# EAGLE board extruder-controller (EAGLE 5.06)
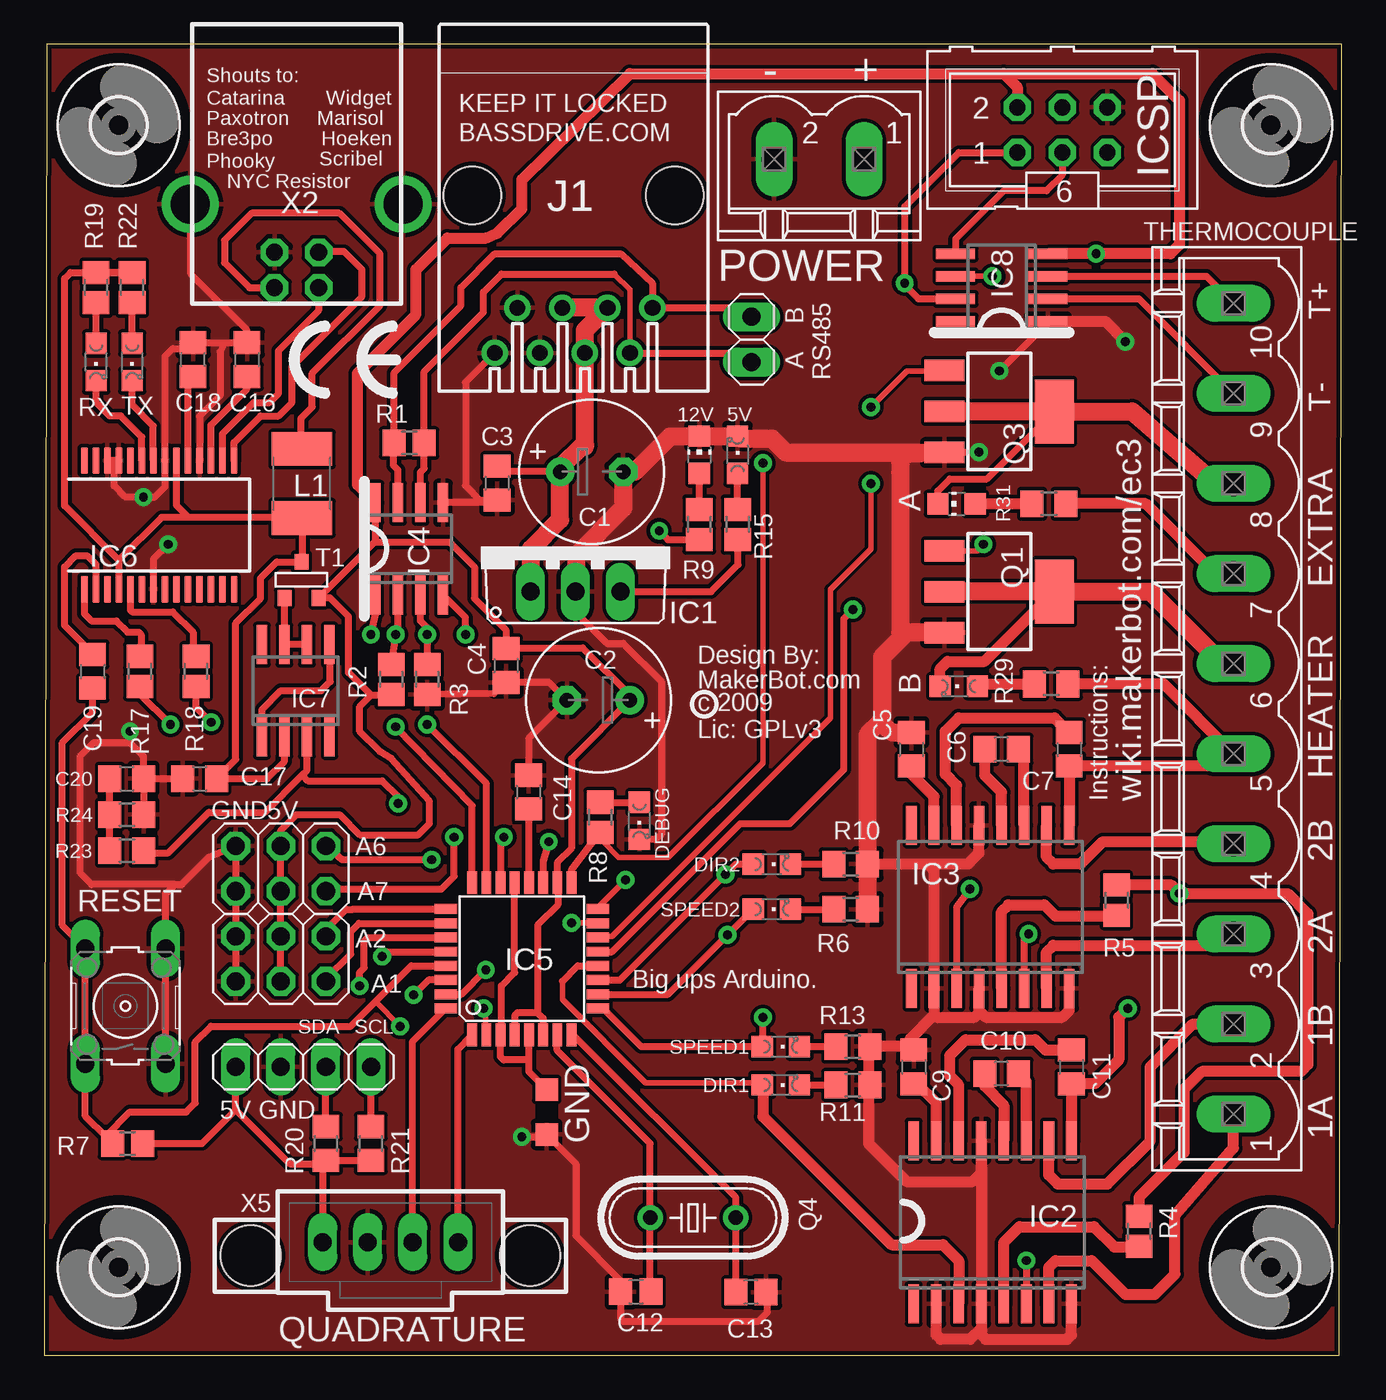
[diagram p0: board, top side]
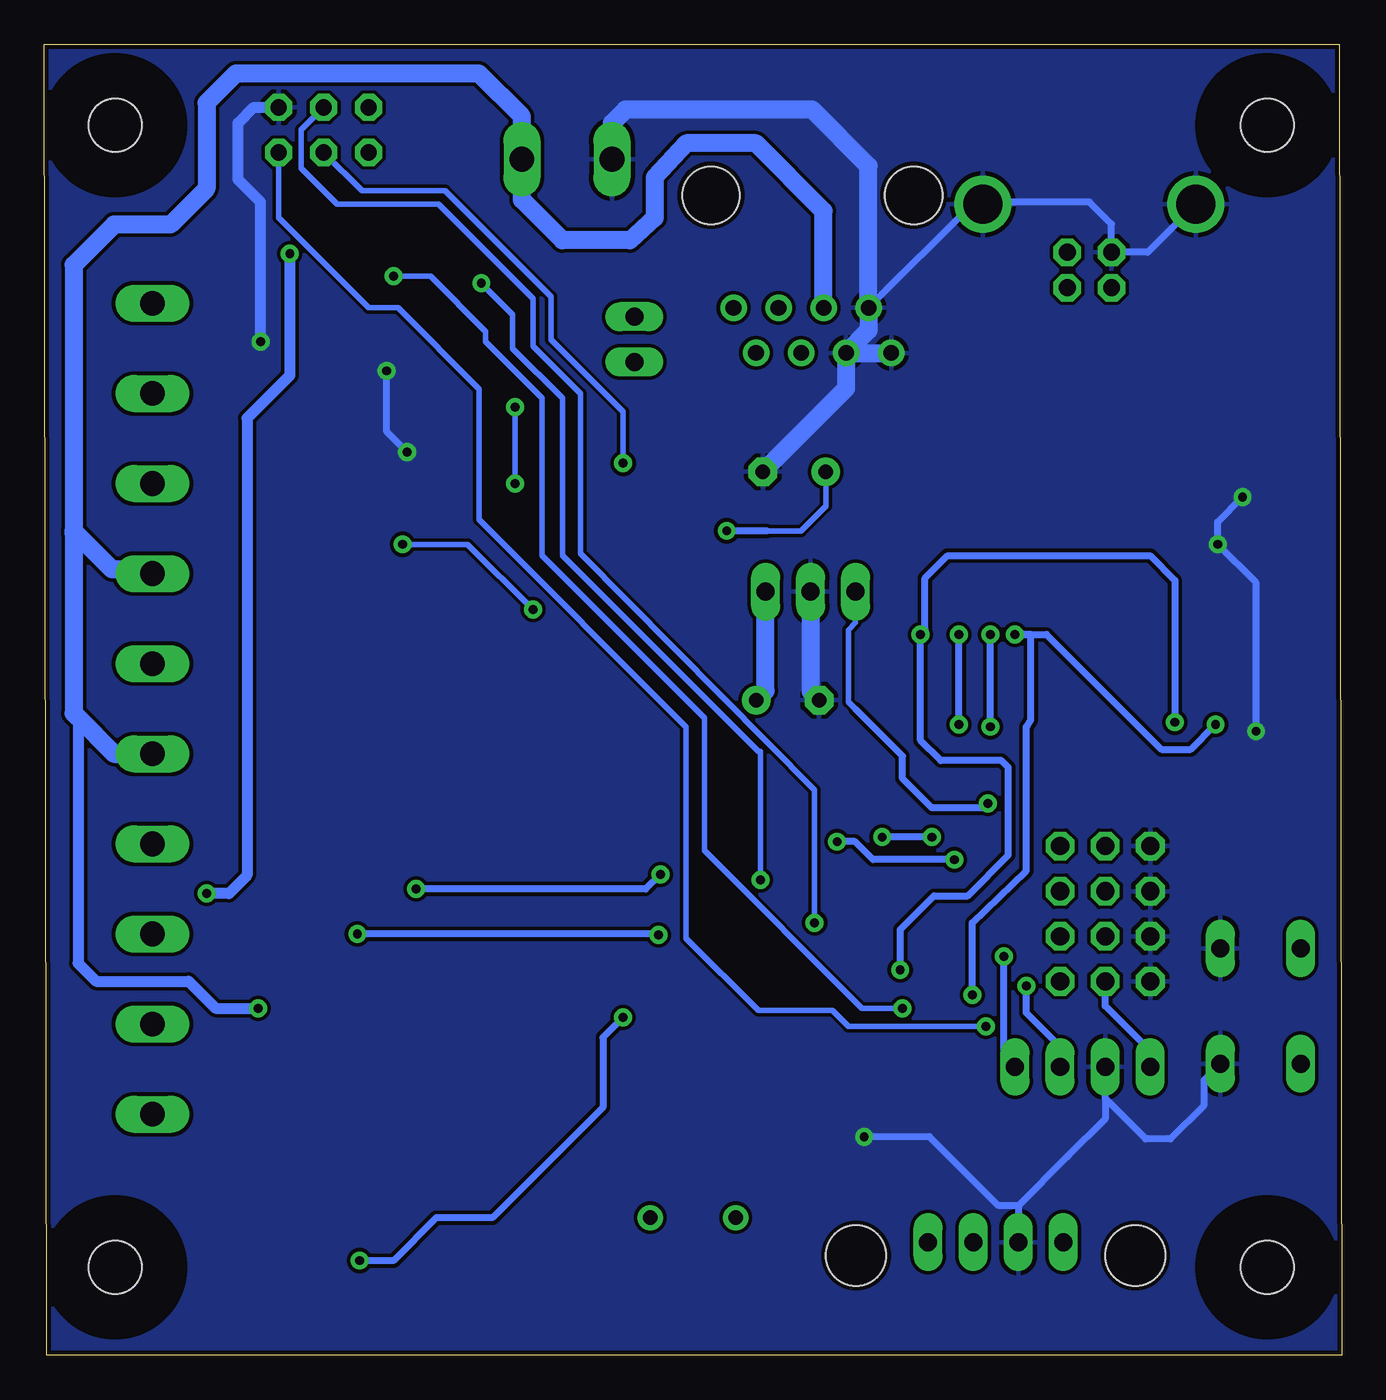
[diagram p1: board, bottom side, seen from below]

Size 73.15 x 73.91 mm. Coordinates in mm from the lower left corner, seen from the top.
Outline: 0,0 73.02,0 73.15,73.91 0.13,73.91 0,0
Copper layers (1*16): Top 0.035mm / dielectric 1.5mm / Bottom 0.035mm
Design rules "SparkFun": minimum track width 8mil, minimum drill 20mil, track to track 8mil, track to pad 8mil, pad to pad 8mil, via to via 8mil, smd to smd 8mil, copper to edge 10mil, drill to drill 8mil, minimum pad ring 12mil, minimum via ring 10mil, stop-mask expansion 4mil, vias tented up to drill 25mil, thermal gap 10mil
Net classes: 0 default: width 0.305 mm; 1 power: width 1.016 mm; 2 motors: width 0.762 mm

## Footprints (pad centres in the part's own frame; a part is rotated, then mirrored left to right if it is on the bottom)
CHIPLED_0805 = smd 1.2 x 1.2: A 0,-1.05; C 0,1.05
CHIP-LED0805 = smd 1.2 x 1.2: A 0,-1.05; C 0,1.05
E3,5-8 = drill 0.813 pad 1.6 round: + -1.778,0 | drill 0.813 pad 1.6 octagon: - 1.778,0
C0805 = smd 1.3 x 1.5: 1 -0.95,0; 2 0.95,0
C0805' = smd 1.3 x 1.5: 1 -0.85,0; 2 0.85,0
TO220V = drill 1.016 long: 1 -2.54,-2.54; 2 0,-2.54; 3 2.54,-2.54
SO16W = smd 0.6 x 2.2: 1 -4.445,-4.6; 2 -3.175,-4.6; 3 -1.905,-4.6; 4 -0.635,-4.6; 5 0.635,-4.6; 6 1.905,-4.6; 7 3.175,-4.6; 8 4.445,-4.6; 9 4.445,4.6; 10 3.175,4.6; 11 1.905,4.6; 12 0.635,4.6; 13 -0.635,4.6; 14 -1.905,4.6; 15 -3.175,4.6; 16 -4.445,4.6
SO08 = smd 0.6 x 2.2: 1 -1.905,-2.6; 2 -0.635,-2.6; 3 0.635,-2.6; 4 1.905,-2.6; 5 1.905,2.6; 6 0.635,2.6; 7 -0.635,2.6; 8 -1.905,2.6
TQFP32-08 = smd 1.27 x 0.559: 1 -4.293,2.8; 2 -4.293,2; 3 -4.293,1.2; 4 -4.293,0.4; 5 -4.293,-0.4; 6 -4.293,-1.2; 7 -4.293,-2; 8 -4.293,-2.8; 17 4.293,-2.8; 18 4.293,-2; 19 4.293,-1.2; 20 4.293,-0.4; 21 4.293,0.4; 22 4.293,1.2; 23 4.293,2; 24 4.293,2.8 | smd 0.559 x 1.27: 9 -2.8,-4.293; 10 -2,-4.293; 11 -1.2,-4.293; 12 -0.4,-4.293; 13 0.4,-4.293; 14 1.2,-4.293; 15 2,-4.293; 16 2.8,-4.293; 25 2.8,4.293; 26 2,4.293; 27 1.2,4.293; 28 0.4,4.293; 29 -0.4,4.293; 30 -1.2,4.293; 31 -2,4.293; 32 -2.8,4.293
SMARTPRJ_SSOP28 = smd 0.381 x 1.499: 1 -4.225,-3.625; 2 -3.575,-3.625; 3 -2.925,-3.625; 4 -2.275,-3.625; 5 -1.625,-3.625; 6 -0.975,-3.625; 7 -0.325,-3.625; 8 0.325,-3.625; 9 0.975,-3.625; 10 1.625,-3.625; 11 2.275,-3.625; 12 2.925,-3.625; 13 3.575,-3.625; 14 4.225,-3.625; 15 4.225,3.625; 16 3.575,3.625; 17 2.925,3.625; 18 2.275,3.625; 19 1.625,3.625; 20 0.975,3.625; 21 0.325,3.625; 22 -0.325,3.625; 23 -0.975,3.625; 24 -1.625,3.625; 25 -2.275,3.625; 26 -2.925,3.625; 27 -3.575,3.625; 28 -4.225,3.625
ML6 = drill 0.914 octagon: 1 -2.54,-1.27; 2 -2.54,1.27; 3 0,-1.27; 4 0,1.27; 5 2.54,-1.27; 6 2.54,1.27
520426-4 = drill 0.889 round: 1 -4.445,6.35; 2 -3.175,8.89; 3 -1.905,6.35; 4 -0.635,8.89; 5 0.635,6.35; 6 1.905,8.89; 7 3.175,6.35; 8 4.445,8.89 | hole 3.251: -5.715,0; 5.715,0
1X02 = drill 1.016 long: 1 -1.27,0; 2 1.27,0
1X04 = drill 1.016 long: 1 -3.81,0; 2 -1.27,0; 3 1.27,0; 4 3.81,0
2X03 = drill 1.016 octagon: 1 -2.54,-1.27; 2 -2.54,1.27; 3 0,-1.27; 4 0,1.27; 5 2.54,-1.27; 6 2.54,1.27
L1812 = smd 1.9 x 3.4: 1 -1.95,0; 2 1.95,0
SOT223 = smd 1.219 x 2.235: 1 -2.311,-3.099; 2 0,-3.099; 3 2.311,-3.099 | smd 3.6 x 2.2: 4 0,3.099
HC49/S = drill 0.813 round: 1 -2.413,0; 2 2.413,0
R0805 = smd 1.3 x 1.5: 1 -0.85,0; 2 0.85,0
R0805' = smd 1.3 x 1.5: 1 -0.95,0; 2 0.95,0
B3F-10XX = drill 1.016 long: 1 -3.251,2.261; 2 3.251,2.261; 3 -3.251,-2.261; 4 3.251,-2.261
SOT-23 = smd 0.787 x 0.889: 1 0.025,-1.016; 2 -0.94,1.016; 3 0.991,1.016
3,0 = hole 3: 0,0
MSTBV2 = drill 1.397 long: 1 -2.54,0; 2 2.54,0
SMARTPRJ_PN61729 = drill 0.95 octagon: 1 1.25,4.71; 2 -1.25,4.71; 3 -1.25,2.71; 4 1.25,2.71 | drill 2.2 round: P$1 -6,0; P$2 6,0
70543-04 = drill 1.016 long: 1 -3.81,0; 2 -1.27,0; 3 1.27,0; 4 3.81,0 | hole 3.404: -7.874,-0.762; 7.874,-0.762
MSTBV10 = drill 1.397 long: 1 -22.86,0; 2 -17.78,0; 3 -12.7,0; 4 -7.62,0; 5 -2.54,0; 6 2.54,0; 7 7.62,0; 8 12.7,0; 9 17.78,0; 10 22.86,0
GND-GNDA = smd 1.27 x 1.27: GND -1.27,0; GNDA 1.27,0

## Placement (x,y rotation side)
5V  [CHIPLED_0805]  39.09,50.77 0 top
12V  [CHIP-LED0805]  36.93,50.77 0 top
A  [CHIP-LED0805]  51.44,48.01 90 top
B  [CHIPLED_0805]  51.56,37.72 90 top
C1  100uF  [E3,5-8]  30.86,49.81 0 top
C2  100uF  [E3,5-8]  31.24,36.93 180 top
C3  100nF  [C0805]  25.53,49.17 270 top
C4  100nF  [C0805]  26.04,38.89 270 top
C5  .22uF  [C0805]  48.9,34.16 270 top
C6  100nF  [C0805]  53.98,34.16 180 top
C7  100nF  [C0805]  57.79,34.16 270 top
C9  .22uF  [C0805]  49.02,16.26 270 top
C10  100nF  [C0805]  53.98,15.88 180 top
C11  100nF  [C0805]  57.91,16.26 270 top
C12  16pf  [C0805']  33.35,3.58 0 top
C13  16pf  [C0805']  39.85,3.56 180 top
C14  100nF  [C0805]  27.3,31.75 270 top
C16  100nF  [C0805]  11.43,56.13 270 top
C17  100nF  [C0805]  8.76,32.51 0 top
C18  100nF  [C0805]  8.38,56.13 90 top
C19  100nF  [C0805]  2.72,38.56 270 top
C20  100nF  [C0805]  4.65,32.51 0 top
DEBUG  [CHIPLED_0805]  33.55,30.12 180 top
DIR1  [CHIPLED_0805]  41.53,15.24 270 top
DIR2  [CHIPLED_0805]  41.02,27.69 270 top
IC1  7805TV  [TO220V]  29.95,45.59 0 top
IC2  A3949  [SO16W]  53.47,7.49 0 top
IC3  A3949  [SO16W]  53.34,25.27 0 top
IC4  SN75176ASOIC  [SO08]  20.57,45.47 0 top
IC5  ATMEGA168  [TQFP32-08]  26.92,22.35 90 top
IC6  FT232RL  [SMARTPRJ_SSOP28]  6.48,46.81 0 top
IC7  LM358D  [SO08]  14.17,37.47 0 top
IC8  MAX6675  [SO08]  53.98,60.2 90 top
ICSP  [ML6]  57.4,69.09 0 top
J1  [520426-4]  29.84,65.41 180 top
JP1  [1X02]  39.88,57.28 270 top
JP4  [1X04]  14.61,16.26 0 top
JP6  [2X03]  13.34,22.35 0 top
JP7  [2X03]  13.34,27.43 0 top
L1  100mA  [L1812]  14.53,49.15 90 top
Q1  NIF5003  [SOT223]  53.85,43.05 270 top
Q3  NIF5003  [SOT223]  53.85,53.21 270 top
Q4  16MHZ  [HC49/S]  36.58,7.75 180 top
R1  180  [R0805]  20.57,51.44 180 top
R2  4.7k  [R0805]  19.56,38.1 270 top
R3  4.7k  [R0805]  21.59,38.1 270 top
R4  10K  [R0805]  61.72,6.99 270 top
R5  10K  [R0805]  60.45,25.65 270 top
R6  1K  [R0805']  45.47,25.15 0 top
R7  10K  [R0805]  4.7,11.94 0 top
R8  1K  [R0805]  31.34,30.33 270 top
R9  1K  [R0805]  36.93,46.84 270 top
R10  1K  [R0805']  45.47,27.69 180 top
R11  1K  [R0805']  45.59,17.4 0 top
R13  1K  [R0805']  45.59,15.24 180 top
R15  1K  [R0805]  39.09,46.84 270 top
R17  1K  [R0805]  5.38,38.56 90 top
R18  1K  [R0805]  8.56,38.56 90 top
R19  1K  [R0805]  2.92,60.2 270 top
R20  4.7K  [R0805']  15.88,11.94 270 top
R21  4.7K  [R0805']  18.41,11.94 270 top
R22  1K  [R0805]  4.95,60.2 270 top
R23  10K  [R0805']  4.65,28.45 0 top
R24  10K  [R0805']  4.65,30.48 180 top
R29  1K  [R0805']  56.77,37.85 0 top
R31  1K  [R0805']  56.64,48.01 0 top
RESET  [B3F-10XX]  4.57,19.68 90 top
RX  [CHIPLED_0805]  2.92,56.01 180 top
SPEED1  1  [CHIPLED_0805]  41.53,17.4 270 top
SPEED2  1  [CHIPLED_0805]  41.02,25.15 270 top
T1  [SOT-23]  14.53,43.71 180 top
TX  [CHIPLED_0805]  4.95,56.01 180 top
U$1  [3,0]  4.19,4.95 0 top
U$2  [3,0]  4.19,69.35 0 top
U$3  [3,0]  69.16,69.35 0 top
U$4  [3,0]  69.16,4.95 0 top
X1  MSTBV2  [MSTBV2]  43.69,67.44 180 top
X2  [SMARTPRJ_PN61729]  14.22,64.9 180 top
X5  C-GRID-04-70543  [70543-04]  19.51,6.38 0 top
X6  MSTBV10  [MSTBV10]  67.06,36.45 90 top
~NUDEV~1  GND-GNDA  [GND-GNDA]  28.32,13.72 90 top

## Library data of the parts
5V 12V A B DEBUG DIR1 DIR2 RX SPEED1 SPEED2 TX = led
C1-C7 C9-C11 C14 C16-C20 R6 R10 R11 R13 R20 R21 R23 R24 R29 R31 = rcl
C12 C13 L1 R1-R5 R7-R9 R15 R17-R19 R22 = resistor
IC1 IC7 = linear
IC2-IC4 IC6 IC8 X2 X5 = reprap
IC5 = SparkFun
ICSP = con-harting-ml
J1 = con-amp
JP1 JP4 JP6 JP7 = pinhead
Q1 Q3 = transistor-power
Q4 = crystal
RESET = switch-omron
T1 = zetex
U$1-U$4 = holes
X1 X6 = con-phoenix-508
~NUDEV~1 = supply1

## Nets
+12V [power]: C1.+ C3.1 C7.2 C11.2 IC1.1 IC2.9 IC3.9 IC7.3 J1.3 J1.4 J1.5 R9.2 R23.2 R29.2 R31.2 X1.1 X6.5 X6.7
A0: IC4.3 IC5.23 R3.1
A1: IC4.2 IC5.24 R2.1
A2: IC5.25 JP6.6
A3: IC5.26 JP6.5
A6: IC5.19 JP7.6
A7: IC5.22 JP7.5
D2: IC5.32 X5.3
D3: IC5.1 X5.4
D4: IC5.2 IC8.6
D5: IC2.6 IC5.9 SPEED1.A
D6: IC3.6 IC5.10 SPEED2.A
D7: DIR2.A IC3.3 IC5.11
D8: DIR1.A IC2.3 IC5.12
D9: IC5.13 Q1.1
D10: IC5.14 Q3.1
D11: IC5.15 ICSP.4
D12: IC5.16 IC8.7 ICSP.1
D13: IC5.17 IC8.5 ICSP.3 R8.2
GND [power]: 5V.C 12V.C C1.- C2.- C3.2 C4.2 C5.1 C9.1 C12.1 C13.1 C14.1 C16.1 C17.1 C18.2 C20.2 DEBUG.C IC1.2 IC2.2 IC2.4 IC2.8 IC2.13 IC3.2 IC3.4 IC3.8 IC3.13 IC4.5 IC6.7 IC6.18 IC6.21 IC6.25 IC6.26 IC8.1 ICSP.6 J1.6 J1.7 J1.8 JP4.2 JP6.1 JP6.2 JP7.1 JP7.2 Q1.3 Q3.3 R3.2 R6.2 R10.1 R11.2 R13.1 R24.1 RESET.3 RESET.4 X1.2 X2.4 X2.P$1 X2.P$2 X5.2 ~NUDEV~1.GND
GNDA: IC5.3 IC5.5 IC5.21 ~NUDEV~1.GNDA
N$3: C9.2 IC2.15
N$4 [motors]: IC2.7 X6.1
N$5 [motors]: IC2.10 X6.2
N$6: C10.2 IC2.12
N$7: C10.1 IC2.11
N$8: DEBUG.A R8.1
N$9: C11.1 IC2.14
N$10: IC8.2 X6.9
N$11: IC8.3 X6.10
N$12: IC2.5 R4.2
N$15: C5.2 IC3.15
N$16: C6.2 IC3.12
N$17: C6.1 IC3.11
N$18: R11.1 SPEED1.C
N$19: C7.1 IC3.14
N$20: C14.2 IC5.20
N$23: DIR1.C R13.2
N$24: IC3.5 R5.2
N$25: 5V.A R15.1
N$26: 12V.A R9.1
N$27 [motors]: IC3.7 X6.3
N$28 [motors]: IC3.10 X6.4
N$29: IC6.15 X2.3
N$30: IC6.16 X2.2
N$31: C12.2 IC5.7 Q4.2
N$32: C13.2 IC5.8 Q4.1
N$33: R6.1 SPEED2.C
N$34 [power]: B.C Q1.2 Q1.4 X6.6
N$35 [power]: A.C Q3.2 Q3.4 X6.8
N$36: C18.1 IC6.19
N$37: L1.2 X2.1
N$38: C16.2 IC6.17
N$39: R19.2 RX.A
N$40: R22.2 TX.A
N$41: A.A R31.1
N$42: B.A R29.1
N$43: DIR2.C R10.2
N$44: IC6.23 RX.C
N$45: IC6.22 TX.C
N$46: C19.1 IC6.2
N$47: IC6.1 R17.2
N$48: IC6.5 R18.2
N$49: C20.1 R23.1 R24.2
N$50: IC7.1 IC7.5
N$51: IC7.6 IC7.7 T1.3
RESET: C19.2 IC5.29 ICSP.5 R7.1 RESET.1 RESET.2
RS485A: IC4.6 J1.2 JP1.2 R1.1
RS485B: IC4.7 J1.1 JP1.1 R1.2
RX: IC4.1 IC5.30 R17.1
SCL: IC5.28 JP4.4 R21.1
SDA: IC5.27 JP4.3 R20.1
TX: IC4.4 IC5.31 R18.1
USBVCC: C17.2 IC6.4 IC6.20 IC7.2 L1.1 R19.1 R22.1 T1.1
V+: IC7.8
V-: IC7.4
VCC: C2.+ C4.1 IC1.3 IC4.8 IC5.4 IC5.6 IC5.18 IC8.4 ICSP.2 JP4.1 JP6.3 JP6.4 JP7.3 JP7.4 R2.2 R4.1 R5.1 R7.2 R15.2 R20.2 R21.2 T1.2 X5.1

## Tracks (layer width: path | path; a pad name or v marks a point on that pad's centre or on a via)
+12V  (via drill 0.5)
  Top 0.406: IC7.3 14.81,32.97 14.54,32.7 | 14.54,32.7 12.45,30.61 9.27,30.61 6.98,28.32 5.72,28.32 R23.2 | R9.2 35.16,45.99 v34.67,46.48 | v19.94,31.11 19.94,31.5 19.05,32.38 14.86,32.38 14.54,32.7 | C1.+ 25.84,49.81 C3.1
  Top 0.61: IC2.9 C11.2 59.25,15.31 60.58,16.64 60.58,19.05 v61.09,19.56 | IC3.9 C7.2 66.99,33.21 X6.5 63.12,37.85 R29.2 | R31.2 62.1,48.01 66.04,44.07 X6.7
  Top 1.016: J1.5 J1.3 30.48,57.79 J1.4 30.48,51.44 | 30.48,51.44 30.48,51.21 | X6.7 68.33,44.07 | IC1.1 27.43,43.08 27.43,45.47 29.08,47.12 C1.+ 29.08,50.04 30.48,51.44
  Bottom 0.305: IC1.1 27.41,41.3 27.81,40.89 27.81,36.83 27.41,36.42 | 32.41,46.48 30.48,46.48 29.08,47.88 C1.+
  Bottom 0.406: 32.41,46.48 v34.67,46.48 | 27.41,36.42 24.77,33.78 24.77,32.51 23.11,30.86 20.19,30.86 v19.94,31.11
  Bottom 0.61: v61.09,19.56 63.5,19.56 65.02,21.08 70.23,21.08 71.25,22.1 71.25,35.94 71.31,36
  Bottom 1.016: 71.44,46.42 69.34,44.32 67.94,44.32 X6.7 | 71.44,46.42 71.5,46.48 71.5,61.47 69.21,63.75 66.04,63.75 64.01,65.79 64.01,70.61 62.36,72.26 48.64,72.26 46.23,69.85 X1.1 | X6.5 69.21,33.91 71.31,36 71.5,36.2 71.5,46.36 71.44,46.42 | X1.1 46.1,67.44 | J1.3 31.88,59.18 | X1.1 46.23,65.15 43.94,62.87 40.13,62.87 38.73,64.14 38.73,66.42 36.96,68.33 33.02,68.33 29.21,64.52 J1.5
A0  (via drill 0.5)
  Top 0.406: R3.1 v21.59,40.64 21.59,41.02 21.21,41.4 IC4.3 | IC5.23 24.92,32.23 v21.59,35.56
  Bottom 0.406: v21.59,35.56 v21.59,40.64
A1  (via drill 0.5)
  Top 0.406: IC4.2 19.94,41.02 v19.81,40.64 R2.1 | IC5.24 24.12,30.99 v19.81,35.43
  Bottom 0.406: v19.81,35.43 v19.81,40.64
A2
  Top 0.406: IC5.25 17.4,25.15 17.02,25.15 16,24.13 JP6.6
A3
  Top 0.406: IC5.26 17.75,24.35 17.27,23.88 17.27,22.61 15.88,21.21 JP6.5
A6  (via drill 0.5)
  Top 0.406: IC5.19 28.12,27.87 v28.45,28.96 | v21.84,27.94 16.76,27.94 JP7.6
  Bottom 0.406: v28.45,28.96 27.43,28.96 26.42,27.94 v21.84,27.94
A7  (via drill 0.5)
  Top 0.406: IC5.22 25.72,29.03 v25.91,29.21 | v23.11,29.21 23.11,27.01 22.4,26.29 16,26.29 JP7.5
  Bottom 0.406: v23.11,29.21 v25.91,29.21
D2
  Top 0.406: X5.3 20.78,17.7 IC5.32
D3
  Top 0.406: X5.4 23.32,17.25 IC5.1
D4  (via drill 0.51)
  Top 0.305: v24.77,19.56 24.89,19.43 24.89,18.16 IC5.2 | v53.47,60.83 IC8.6
  Bottom 0.305: v24.77,19.56 27.05,19.56 35.94,28.45 35.94,35.94 45.09,45.09 45.09,53.98 48.26,57.15 48.26,57.72 IC8.6 v53.47,60.83
D5  (via drill 0.5)
  Top 0.406: IC5.9 31.5,19.55 33.66,17.4 SPEED1.A 40.51,17.43 v40.51,19.05 | v55.37,5.33 IC2.6
  Bottom 0.406: v55.37,5.33 53.47,5.33 51.05,7.75 47.88,7.75 41.66,13.97 41.66,17.91 v40.51,19.05
D6  (via drill 0.5)
  Top 0.406: IC5.10 35.18,20.35 v38.53,23.7 SPEED2.A | IC3.6 55.25,23.5 v55.5,23.75
  Bottom 0.406: v55.5,23.75 38.57,23.75 v38.53,23.7
D7  (via drill 0.5)
  Top 0.406: IC5.11 32.46,21.15 v38.42,27.11 | v38.42,27.11 38.99,27.69 DIR2.A | IC3.3 51.44,25.27 v52.2,26.29 | v38.42,27.11 38.73,27.43
  Bottom 0.406: v52.2,26.29 39.24,26.29 v38.42,27.11
D8
  Top 0.305: 29.21,21.08 29.21,20.07 33.91,15.37 40.35,15.37 DIR1.A
  Top 0.406: IC5.12 30.08,21.95 29.21,21.08
  Top 0.61: IC2.3 51.56,5.33 50.67,6.22 47.75,6.22 40.51,13.46 40.51,15.21 DIR1.A
D9  (via drill 0.5)
  Top 0.305: 50.72,45.34 52.58,45.34 v52.96,45.72
  Top 0.406: IC5.13 32.02,22.75 39.24,29.97 42.04,29.97 45.09,33.02 45.09,41.53 v45.59,42.04 | 50.72,45.34 Q1.1
  Bottom 0.305: v52.96,45.72 49.28,45.72 v45.59,42.04
D10  (via drill 0.51)
  Top 0.305: IC5.14 31.24,23.62 32,23.62 44.32,35.94 44.32,43.18 46.61,45.47 v46.61,49.15 | Q3.1 50.67,55.5 48.64,55.5 v46.61,53.47
  Bottom 0.305: v46.61,49.15 v46.61,53.47
D11  (via drill 0.51)
  Top 0.305: v29.72,24.38 31.11,24.38 IC5.15
  Bottom 0.305: v29.72,24.38 29.72,31.88 42.93,45.21 42.93,54.23 45.59,56.9 45.59,59.56 50.93,64.9 56.64,64.9 58.67,66.93 58.67,69.09 ICSP.4
D12  (via drill 0.5, 0.51)
  Top 0.305: v32.77,26.8 31.24,25.27 IC5.16
  Top 0.406: IC8.7 49.28,59.56 48.77,60.07 48.51,60.33 v48.51,60.45 48.51,64.77 51.56,67.82 ICSP.1
  Bottom 0.305: v32.77,26.8 32.77,34.04 32.89,34.04 43.94,45.09 43.94,53.98 46.74,56.77 46.74,58.67 v48.51,60.45
D13  (via drill 0.51)
  Top 0.305: v40.51,50.29 40.51,33.4 35.18,28.07 32.39,28.07 31.5,28.96 R8.2
  Top 0.406: IC5.17 29.72,27.35 R8.2 | IC8.5 51.38,62.93 54.1,65.66 56.52,65.66 57.4,66.55 ICSP.3
  Bottom 0.305: v40.51,50.29 40.51,53.21 44.58,57.28 44.58,59.69 50.55,65.66 55.25,65.66 ICSP.3
GND  (via drill 0.5)
  Top 0.406: IC6.26 IC6.25 3.94,50.17 3.94,49.02 4.57,48.39 v5.59,48.39 6.22,48.39 6.8,48.97 IC6.21 6.8,56.33 7.24,56.77 8.32,56.77 C18.2 10.16,57.08 | 10.16,57.08 C16.1 11.43,57.79 8.26,60.96 8.26,64.87 X2.P$2 | IC6.18 8.75,52.95 9.91,54.1 9.91,56.58 10.16,57.08 | IC4.5 25.37,48.07 C3.2 24.55,48.22 23.75,49.02 23.75,54.86 J1.8 | R3.2 25.35,37.3 C4.2 28.46,37.94 C2.- 27.3,34.77 C14.1 | C20.2 C17.1 | C20.2 R24.1 | 7.37,26.54 2.67,26.54 2.03,27.18 2.03,33.78 2.79,34.54 4.83,34.54 | 7.37,26.54 7.75,26.54 9.27,28.07 JP7.2 JP7.1 JP6.2 JP6.1 | 4.83,34.54 5.59,33.78 5.59,32.52 C20.2 | IC6.7 6.15,44.89 v6.98,45.72 | 4.83,34.54 v4.83,35.18 | v26.92,12.32 28.19,12.32 ~NUDEV~1.GND 29.97,10.79 29.97,6.73 32.5,4.2 C12.1 32.5,2.04 32.64,1.91 40.26,1.91 40.77,2.41 40.77,3.49 C13.1 | RESET.3 RESET.4 6.83,26.01 7.37,26.54 | DEBUG.C 34.41,29.07 34.8,29.34 34.8,37.97 32.64,40.13 31.72,40.13 29.95,41.91 IC1.2 | IC8.1 56.58,58.23 v53.85,55.5 | v52.71,50.93 50.77,50.93 Q3.3
  Top 0.61: IC2.8 57.91,1.14 57.66,0.89 53.09,0.89 52.83,1.14 IC2.4 | IC2.4 52.83,1.52 52.2,0.89 50.55,0.89 50.29,1.14 IC2.2 | IC2.4 IC2.13 52.83,10.29 52.32,9.78 48.64,9.78 46.48,11.94 46.48,15.18 R13.1 46.48,15.05 46.48,17.34 R11.2 48.83,17.4 48.83,17.84 50.16,19.18 | 50.16,19.18 IC3.2 50.16,27.3 49.78,27.69 | 50.16,19.18 50.29,19.05 52.45,19.05 52.71,19.3 IC3.4 52.71,19.43 53.09,19.05 57.4,19.05 57.79,19.43 IC3.8 | IC3.13 52.71,28.32 52.07,27.69 49.78,27.69 | R10.1 49.78,27.69 | IC8.1 59.82,58.29 v60.96,57.15
  Top 1.016: IC1.2 29.97,43.08 29.97,45.09 32.64,47.75 C1.- 33.3,49.81 35.31,51.82 36.92,51.82 12V.C 5V.C 39.23,51.69 41.02,51.69 41.81,50.9 Q3.3 48.23,50.78 48.26,49.78 48.26,40.77 50.72,40.77 Q1.3 48.62,40.74 47.24,39.37 47.24,35.81 47.12,35.69 | R6.2 R10.1 46.42,34.99 47.12,35.69 | 48.83,17.4 C9.1 | C5.1 47.82,35.11 47.12,35.69
  Bottom 0.406: X2.P$2 10.93,62.19 X2.4 12.97,63.77 14.22,65.02 20.1,65.02 X2.P$1 20.83,64.9 J1.7 | v5.59,48.39 6.98,46.99 v6.98,45.72 4.83,43.56 v4.83,35.18 | 18.24,8.43 X5.2 | 15.49,11.18 18.24,8.43 | 15.49,11.18 15.37,11.3 | 18.24,8.43 19.36,8.43 23.24,12.32 v26.92,12.32 | 13.34,14.48 JP4.2 | 13.34,14.48 11.05,12.19 9.65,12.19 7.75,14.1 7.75,15.52 RESET.3 | 13.34,14.48 13.34,13.33 15.49,11.18 | v53.85,55.5 53.85,52.07 v52.71,50.93
  Bottom 0.61: v60.96,57.15 60.96,65.02 62.23,66.29 62.23,69.47 61.34,70.36 ICSP.6
  Bottom 1.016: IC1.2 29.95,37.41 C2.- | J1.6 26.67,57.79 J1.7 26.67,67.06 29.84,70.23 40.39,70.23 41.15,69.47 X1.2 | J1.6 J1.8 | J1.6 27.94,54.51 C1.-
  pour Bottom: -1.14,74.55 73.79,74.55 73.79,-0.38 -1.14,-0.38
  pour Top: -1.14,74.55 73.79,74.55 73.79,0.89 73.79,-0.38 -1.14,-0.38
GNDA
  Top 0.406: 27.32,16.64 27.32,15.98 ~NUDEV~1.GNDA | 27.32,16.64 IC5.5 | 27.32,16.64 25.91,16.64 25.72,16.82 IC5.3 25.78,18.12 25.78,20.83 26.52,21.57 IC5.21
N$3
  Top 0.61: C9.2 49.21,15.31 50.29,14.22 IC2.15
N$4
  Top 0.61: X6.1 67.06,11.68 63.75,7.87 63.75,4.57 62.61,3.43 60.96,3.43 59.05,5.33 57.02,5.33 56.64,4.95 IC2.7
N$5
  Top 0.61: IC2.10 56.64,10.16 57.15,9.65 59.94,9.65 62.36,12.06 62.36,16.26 64.77,18.67 X6.2
N$6
  Top 0.61: C10.2 53.03,15.17 54.1,14.1 IC2.12
N$7
  Top 0.61: IC2.11 55.37,15.43 C10.1
N$8
  Top 0.406: R8.1 DEBUG.A
N$9
  Top 0.61: C11.1 56.45,17.21 55.88,17.78 51.94,17.78 51.05,16.89 51.05,15.75 51.56,15.24 IC2.14
N$10
  Top 0.406: IC8.2 61.72,59.56 X6.9
N$11
  Top 0.406: IC8.3 65.53,60.83 X6.10
N$12
  Top 0.61: R4.2 61.68,6.1 60.33,6.1 59.18,7.24 54.99,7.24 54.1,6.35 IC2.5
N$15
  Top 0.61: C5.2 48.9,32.77 50.16,31.5 IC3.15
N$16
  Top 0.61: C6.2 53.03,32.7 53.98,31.75 IC3.12
N$17
  Top 0.61: IC3.11 55.25,33.84 C6.1
N$18
  Top 0.406: SPEED1.C R11.1
N$19
  Top 0.61: IC3.14 51.44,32.13 50.8,32.77 50.8,35.18 51.56,35.94 56.96,35.94 C7.1
N$20
  Top 0.406: IC5.20 27.32,30.78 C14.2
N$23
  Top 0.406: DIR1.C R13.2
N$24
  Top 0.61: IC3.5 53.98,25.02 54.36,25.4 56.39,25.4 57.02,24.77 60.41,24.77 R5.2
N$25
  Top 0.406: R15.1 5V.A
N$26
  Top 0.406: R9.1 12V.A
N$27
  Top 0.61: IC3.7 56.52,22.73 56.9,23.11 67.06,23.11 X6.3
N$28
  Top 0.61: IC3.10 56.52,28.07 56.9,27.69 58.42,27.69 59.69,28.96 67.56,28.96 X6.4
N$29
  Top 0.406: IC6.15 10.7,51.47 12.19,52.96 13.21,52.96 13.97,53.72 13.97,55.75 17.91,59.69 17.91,61.21 16.89,62.23 15.52,62.23 X2.3
N$30
  Top 0.406: IC6.16 10.05,51.96 11.81,53.72 12.7,53.72 13.21,54.23 13.21,56.64 15.49,58.93 15.49,60.17 X2.2
N$31
  Top 0.406: IC5.7 28.92,17.18 34.16,11.94 Q4.2 34.16,3.62 C12.2
N$32
  Top 0.406: IC5.8 29.82,18.06 38.99,8.89 Q4.1 38.99,3.57 C13.2
N$33
  Top 0.406: SPEED2.C R6.1
N$34
  Top 0.61: B.C 50.51,38.7 50.93,39.12 53.01,39.12 Q1.4
  Top 1.016: X6.6 66.42,38.99 62.36,43.05 Q1.4 Q1.2
N$35
  Top 0.406: A.C 50.39,48.73 51.05,49.4 53.14,49.4 Q3.4
  Top 1.016: X6.8 66.04,49.15 61.34,53.21 Q3.4 Q3.2
N$36
  Top 0.406: IC6.19 8.1,54.65 C18.1
N$37
  Top 0.406: X2.1 11.57,60.19 10.16,61.6 10.16,62.87 11.68,64.39 16.64,64.39 18.92,62.1 18.92,59.18 15.11,55.37 15.11,53.47 14.48,52.83 14.48,50.77 L1.2
N$38
  Top 0.406: IC6.17 9.4,52.46 11.43,54.48 C16.2
N$39
  Top 0.406: RX.A R19.2
N$40
  Top 0.406: TX.A R22.2
N$41
  Top 0.61: A.A R31.1
N$42
  Top 0.61: R29.1 52.74,37.85 B.A
N$43
  Top 0.406: DIR2.C R10.2
N$44
  Top 0.406: IC6.23 5.5,51.78 4.32,52.96 3.68,52.96 2.92,53.72 RX.C
N$45
  Top 0.406: IC6.22 6.15,52.4 4.95,53.59 TX.C
N$46
  Top 0.406: C19.1 2.72,39.57 1.14,41.15 1.14,44.45 1.78,45.09 2.41,45.09 2.9,44.6 IC6.2
N$47
  Top 0.406: IC6.1 2.25,41.82 2.67,41.4 4.06,41.4 4.7,40.77 5.33,40.77 5.46,40.64 5.46,39.48 R17.2
N$48
  Top 0.406: IC6.5 4.85,42.01 4.95,41.91 7.24,41.91 8.38,40.77 8.38,39.59 R18.2
N$49
  Top 0.406: R23.1 R24.2 C20.1
N$50
  Top 0.406: IC7.1 12.27,36.4 13.34,37.47 15.62,37.47 16.13,37.97 16.13,40.01 IC7.5
N$51
  Top 0.406: T1.3 IC7.7 IC7.6
RESET  (via drill 0.51)
  Top 0.305: 18.67,19.94 v20.07,18.54
  Top 0.406: C19.2 2.72,36.25 1.02,34.54 1.02,24.23 RESET.2 RESET.1 2.31,13.48 3.45,12.34 | IC5.29 20.68,21.95 18.67,19.94 17.27,18.54 9.4,18.54 8.51,17.65 8.51,14.22 8,13.72 4.83,13.72 3.45,12.34 | 3.45,12.34 R7.1
  Bottom 0.305: ICSP.5 59.94,64.14 54.86,59.05 53.21,59.05 48.64,54.48 48.64,47.12 36.96,35.43 36.96,23.5 32.89,19.43 28.7,19.43 27.81,18.54 v20.07,18.54
RS485A
  Top 0.305: 32.13,60.96 33.02,60.07 J1.2
  Top 0.406: IC4.6 21.21,49.78 21.42,50 R1.1 21.42,55.46 24.77,58.8 24.77,59.94 25.78,60.96 32.13,60.96 | J1.2 39.37,56.52 JP1.2
RS485B
  Top 0.406: IC4.7 19.94,49.91 19.68,50.17 19.68,51.4 R1.2 19.72,55.41 23.49,59.18 23.49,60.2 25.4,62.1 32.51,62.1 34.29,60.45 J1.1 39.37,59.05 JP1.1
RX  (via drill 0.5)
  Top 0.406: R17.1 5.38,37.29 v7.11,35.56 | IC4.1 18.67,41.78 v18.41,40.64 | IC5.30 21.66,21.15 v20.83,20.32
  Bottom 0.406: v7.11,35.56 8.51,34.16 10.16,34.16 16.64,40.64 v18.41,40.64 17.53,40.64 17.53,35.81 17.78,35.43 17.78,27.3 20.83,24.38 v20.83,20.32
SCL  (via drill 0.5)
  Top 0.406: R21.1 JP4.4 | IC5.28 19.32,22.75 v19.05,22.48
  Bottom 0.406: v19.05,22.48 19.05,16.89 JP4.4
SDA  (via drill 0.5)
  Top 0.406: R20.1 JP4.3 | IC5.27 18.22,23.55 18.03,23.37 18.03,21.84 17.78,21.59 v17.78,20.83
  Bottom 0.406: v17.78,20.83 17.78,19.3 15.88,17.4 JP4.3
TX  (via drill 0.5)
  Top 0.406: R18.1 8.56,36.53 v9.4,35.69 | v23.75,40.64 23.75,41.6 IC4.4 | IC5.31 23.53,20.35 v24.89,21.72
  Bottom 0.406: v9.4,35.69 9.4,43.69 10.79,45.09 22.22,45.09 23.49,43.82 23.49,40.89 v23.75,40.64 23.75,34.67 22.61,33.53 19.18,33.53 18.8,33.15 18.8,28.19 21.08,25.91 22.99,25.91 24.89,24 v24.89,21.72
USBVCC
  Top 0.406: R19.1 R22.1 1.49,61.05 1.14,60.71 1.14,47.9 4.2,44.84 | IC6.20 7.45,47.92 8.13,47.24 | 14.57,47.24 8.13,47.24 | 14.57,47.24 L1.1 | 8.13,47.24 6.6,47.24 4.2,44.84 | 4.2,44.84 IC6.4 | 14.57,47.24 14.57,44.8 T1.1 13.11,44.73 12.19,43.82 12.19,42.67 10.79,41.28 10.79,33.59 C17.2 12.57,32.51 13.54,33.48 IC7.2
VCC  (via drill 0.5)
  Top 0.406: 18.67,45.9 IC4.8 | 18.67,45.9 T1.2 16.1,42.7 17.14,41.66 17.14,38.48 18.41,37.21 | 18.67,45.9 18.72,45.85 22.86,45.85 24.26,44.45 24.26,42.67 26.04,40.89 C4.1 26.08,39.88 30.35,39.88 33.02,37.21 C2.+ 29.72,33.63 29.72,28.57 28.92,27.78 IC5.18 28.96,26.61 28.96,25.4 27.81,24.26 27.81,19.3 | JP6.3 JP6.4 JP7.3 JP7.4 13.34,29.59 14.22,30.48 16.64,30.48 17.78,29.34 21.08,29.34 21.72,29.97 21.72,31.24 19.56,33.66 18.92,34.04 17.78,35.18 17.78,36.58 18.41,37.21 | X5.1 15.7,10.81 R20.2 | R20.2 R21.2 | 10.79,13.84 JP4.1 | 10.79,13.84 13.84,10.79 15.68,10.79 R20.2 | R7.2 8.89,11.94 10.79,13.84 | IC5.4 26.52,19.16 26.67,19.3 27.81,19.3 | IC5.6 28.12,18.99 27.81,19.3 | 18.41,37.21 19.52,37.21 R2.2 | IC1.3 37.59,43.05 39.12,44.58 39.12,45.96 R15.2
  Top 0.61: R4.1 61.72,8.89 64.26,11.43 64.26,14.99 65.28,16 70.87,16 71.25,16.38 71.25,24.89 70.1,26.04 v64.01,26.04 63.54,26.5 R5.1 | IC8.4 v59.31,62.1 63.5,62.1 64.01,62.61 64.01,70.74 62.48,72.26 54.1,72.26 | 54.1,72.26 33.02,72.26 26.92,66.29 26.92,64.64 25.54,63.26 24.9,62.99 22.73,62.99 20.95,61.21 20.95,58.67 17.65,55.37 17.65,49.08 IC4.8 | ICSP.2 54.86,71.5 54.1,72.26
  Bottom 0.406: JP6.3 13.34,19.68 10.79,17.14 JP4.1
  Bottom 0.61: v64.01,26.04 62.74,26.04 61.72,27.05 61.72,52.83 59.31,55.25 v59.31,62.1
  Bottom 1.016: IC1.3 32.49,37.47 C2.+

## Text on the board
tPlace: Shouts to: | - | + | Catarina | Widget | KEEP IT LOCKED | Paxotron | Marisol | BASSDRIVE.COM | Bre3po | Hoeken | Phooky | Scribel | NYC Resistor | THERMOCOUPLE | POWER | T+ | B | A | RS485 | T- | EXTRA | Design By: | MakerBot.com | c 2009 | Lic: GPLv3 | HEATER | Instructions: | wiki.makerbot.com/ec3 | GND | 5V | A6 | 2B | A7 | A2 | 2A | A1 | Big ups Arduino. | SDA | SCL | 1B | 5V | GND | GND | 1A | QUADRATURE